# EAGLE board %C2%B5AvaNut_R2 (EAGLE 6.2)
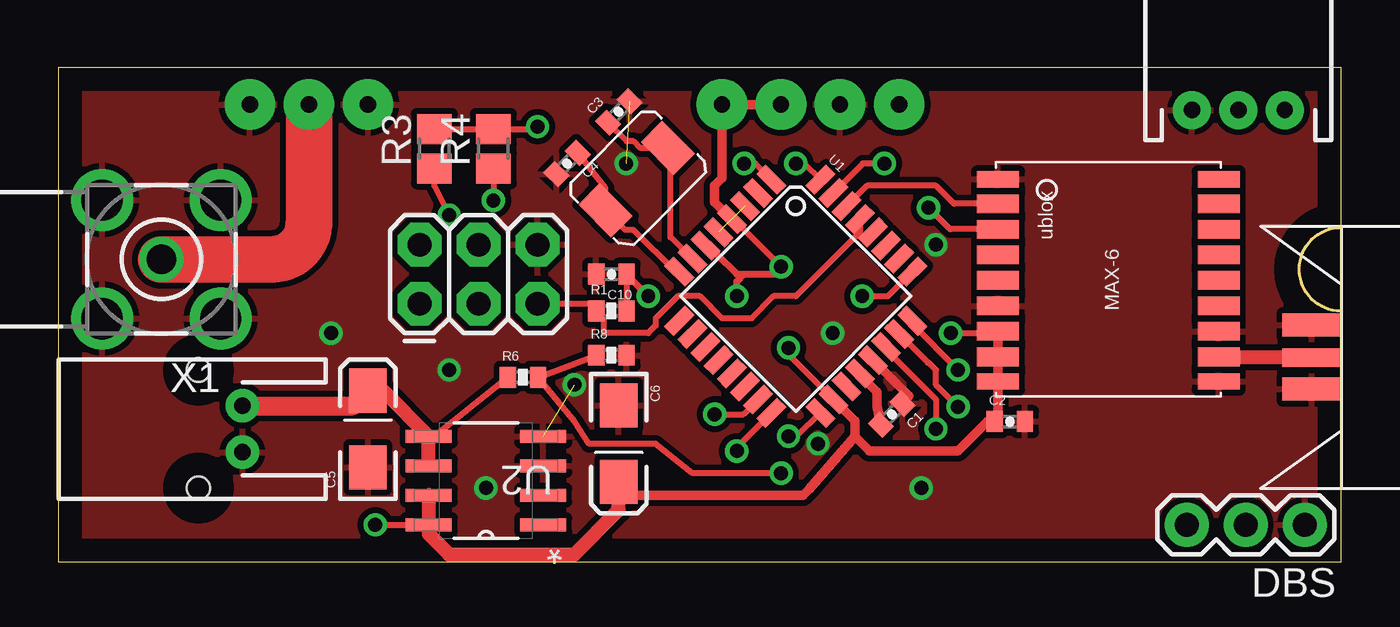
[diagram p0: board, top side]
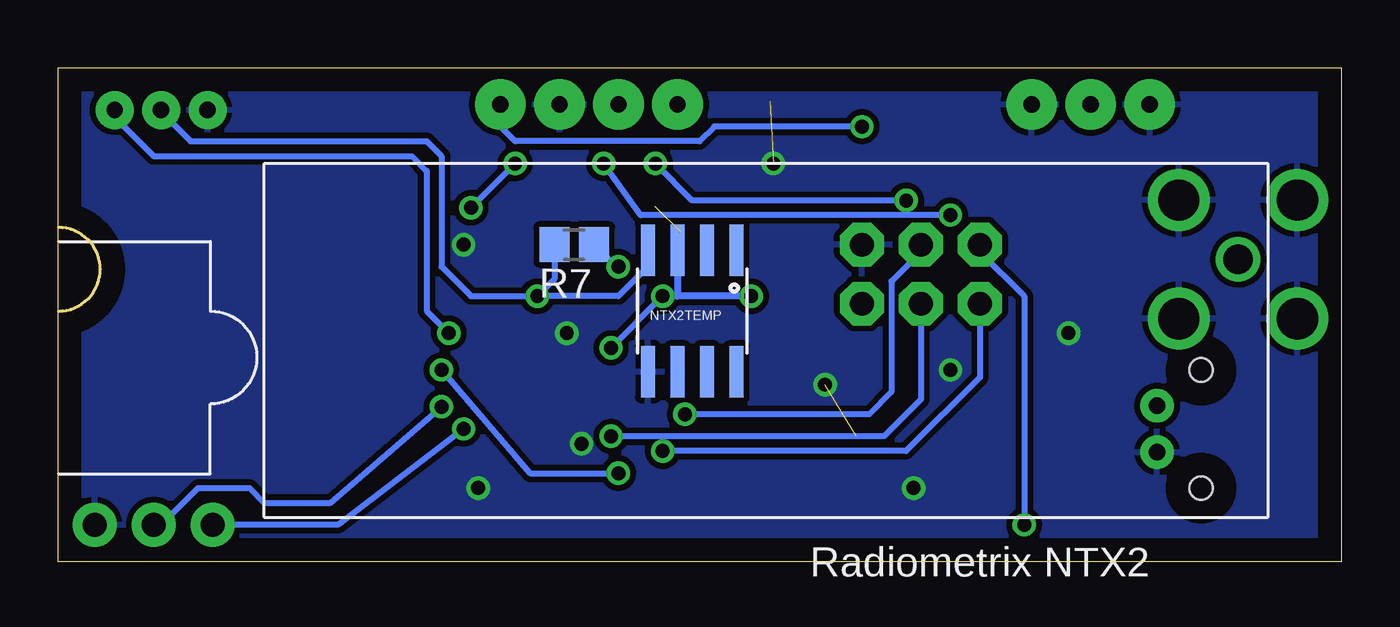
[diagram p1: board, bottom side, seen from below]

Size 55.23 x 21.26 mm. Coordinates in mm from the lower left corner, seen from the top.
Outline: 0,0 55.23,0 55.23,21.26 0,21.26 0,0
Copper layers (1*16): Top 0.035mm / dielectric 1.5mm / Bottom 0.035mm
Design rules: minimum track width 10mil, minimum drill 24mil, track to track 8mil, track to pad 8mil, pad to pad 8mil, via to via 8mil, smd to smd 8mil, copper to edge 40mil, drill to drill 8mil, minimum pad ring 10mil, minimum via ring 8mil, stop-mask expansion 4mil, vias tented up to drill 0mil, thermal gap 10mil
Net classes: 1 vcc: width 0.254 mm

## Footprints (pad centres in the part's own frame; a part is rotated, then mirrored left to right if it is on the bottom)
0402-CAP = smd 0.7 x 0.9: 1 -0.65,0; 2 0.65,0
EIA3216-KIT = smd 1.9 x 1.6: A 1.65,0; C -1.65,0
1X03 = drill 1.016 pad 1.88: 1 0,0; 2 2.54,0; 3 5.08,0
2X3 = drill 1.016 pad 1.88 octagon: 1 0,0; 2 0,2.54; 3 2.54,0; 4 2.54,2.54; 5 5.08,0; 6 5.08,2.54
JST-3-PTH = drill 0.7 pad 1.626: 1 -2,-5; 2 0,-5; 3 2,-5
DS18B20_SOIC = smd 0.61 x 2.21: DQ 1.905,-2.616; GND 1.905,2.616; NC -1.905,-2.616; NC2 -0.635,-2.616; NC3 -1.905,2.616; NC4 -0.635,2.616; NC5 0.635,2.616; VCC 0.635,-2.616
0402-RES = smd 0.7 x 0.9: 1 -0.65,0; 2 0.65,0
R0805 = smd 1.3 x 1.5: 1 -0.85,0; 2 0.85,0
TQFP32-08 = smd 1.27 x 0.559: 1 -4.293,2.8; 2 -4.293,2; 3 -4.293,1.2; 4 -4.293,0.4; 5 -4.293,-0.4; 6 -4.293,-1.2; 7 -4.293,-2; 8 -4.293,-2.8; 17 4.293,-2.8; 18 4.293,-2; 19 4.293,-1.2; 20 4.293,-0.4; 21 4.293,0.4; 22 4.293,1.2; 23 4.293,2; 24 4.293,2.8 | smd 0.559 x 1.27: 9 -2.8,-4.293; 10 -2,-4.293; 11 -1.2,-4.293; 12 -0.4,-4.293; 13 0.4,-4.293; 14 1.2,-4.293; 15 2,-4.293; 16 2.8,-4.293; 25 2.8,4.293; 26 2,4.293; 27 1.2,4.293; 28 0.4,4.293; 29 -0.4,4.293; 30 -1.2,4.293; 31 -2,4.293; 32 -2.8,4.293
SOIC127P600X175-8N = smd 1.981 x 0.559: 1 -2.464,1.905; 2 -2.464,0.635; 3 -2.464,-0.635; 4 -2.464,-1.905; 5 2.464,-1.905; 6 2.464,-0.635; 7 2.464,0.635; 8 2.464,1.905
UBLOX_MAX-6 = smd 1.8 x 0.7: 1_GND 4.95,-4.4; 9_V_RESET 4.95,4.3; 10_GND -4.55,4.3; 18_RESERVED -4.55,-4.4 | smd 1.8 x 0.8: 2_TXD1 4.95,-3.35; 3_RXD1 4.95,-2.25; 4_TIMEPULSE 4.95,-1.15; 5_EXTINT0 4.95,-0.05; 6_V_BCKP 4.95,1.05; 7_VCC_IO 4.95,2.15; 8_VCC 4.95,3.25; 11_RF_IN -4.55,3.25; 12_GND -4.55,2.15; 13_ANTON -4.55,1.05; 14_VCC_RF -4.55,-0.05; 15_RESERVED -4.55,-1.15; 16_SDA2 -4.55,-2.25; 17_SCL2 -4.55,-3.35
ABRACON_ABM3_CRYSTAL = smd 1.3 x 2: P$1 -3.4,0.1; P$2 0.4,0.1
SARANTEL-SR1202 = smd 2.5 x 0.8: FEED 0,0 | smd 2.5 x 1: GND1 0,1.4; GND2 0,-1.35
NTX2 = drill 0.7 pad 2.184: 0V -2.54,-10.16; EN -7.62,-10.16; RFGND -22.86,-10.16; RFGND2 -27.94,-10.16; RFOUT -25.4,-10.16; TXD 0,-10.16; VCC -5.08,-10.16
M02-JST-PTH = drill 0.7 pad 1.448: 1 -1,0; 2 1,0 | hole 1: -2.54,1.905; 2.54,1.905
BU-SMA-H = drill 1.27: 1 0,0 | drill 1.778: 2 -2.55,2.55; 3 2.55,2.55; 4 2.55,-2.55; 5 -2.55,-2.55

## Placement (x,y rotation side)
C1  0.1uF  [0402-CAP]  35.88,6.35 225 top
C2  0.1uF  [0402-CAP]  40.96,6.03 0 top
C3  18pF  [0402-CAP]  24.13,19.37 45 top
C4  18pF  [0402-CAP]  21.91,17.14 225 top
C5  [EIA3216-KIT]  13.34,5.72 90 top
C6  4.7uF  [EIA3216-KIT]  24.13,5.08 270 top
C10  0.1uF  [0402-CAP]  23.81,12.38 180 top
DBS  [1X03]  53.66,1.59 180 top
FUCKINGANNOYING  AVR_SPI_PRG_6PTH  [2X3]  15.56,11.11 0 top
JP6  [JST-3-PTH]  50.8,24.45 0 top
NTX2TEMP  DS1821  [DS18B20_SOIC]  27.94,10.8 180 bottom
R1  10k  [0402-RES]  23.81,10.8 0 top
R3  47K  [R0805]  16.19,17.78 90 top
R4  39k  [R0805]  18.73,17.78 90 top
R6  100k  [0402-RES]  20,7.94 0 top
R7  4k7  [R0805]  33.02,13.65 180 bottom
R8  10k  [0402-RES]  23.81,8.89 0 top
U1  ATMEGA328  [TQFP32-08]  31.75,11.43 315 top
U2  TPS76633D  [SOIC127P600X175-8N]  18.41,3.49 180 top
U$1  UBLOX_MAX-6  [UBLOX_MAX-6]  45.4,12.06 180 top
U$2  ABRACON_ABM3_CRYSTAL  [ABRACON_ABM3_CRYSTAL]  26.04,17.46 45 top
U$3  SARANTEL-SR1202  [SARANTEL-SR1202]  53.95,8.79 0 top
U$4  NTX2  [NTX2]  36.2,9.53 180 bottom
U$6  M02-JST-PTH  [M02-JST-PTH]  7.94,5.72 90 top
X1  BU-SMA-H  [BU-SMA-H]  4.45,13.02 180 top

## Library data of the parts
C1-C6 C10 DBS FUCKINGANNOYING JP6 R1 R6 R8 U1 = SparkFun
NTX2TEMP U$1-U$4 U$6 = ava
R3 R4 R7 = resistor
U2 = ava; DESCRIPTION: ULTRALOW QUIESCENT CURRENT 250-mA LOW DROPOUT VOLTAGE REGULATORS; MPN: TPS76633D; OC_FARNELL: 8461422; OC_NEWARK: 77C1060; PACKAGE: SOIC-8; SUPPLIER: Texas Instruments
X1 = con-coax; OC_FARNELL: unknown; OC_NEWARK: unknown

## Nets
AREF: C1.2 U1.20
GND [vcc]: C1.1 C2.2 C3.2 C4.2 C5.C C6.C C10.2 DBS.1 FUCKINGANNOYING.6 JP6.1 NTX2TEMP.GND R8.2 U1.3 U1.5 U1.21 U2.3 U2.4 U$1.1_GND U$1.6_V_BCKP U$1.10_GND U$1.12_GND U$3.GND1 U$3.GND2 U$4.0V U$4.RFGND U$4.RFGND2 U$6.1 X1.2 X1.3 X1.4 X1.5
MISO: FUCKINGANNOYING.1 U1.16
MOSI: FUCKINGANNOYING.4 U1.15
N$1: U$4.RFOUT X1.1
N$2: R3.2 R4.2 U$4.TXD
N$4: U$1.11_RF_IN U$3.FEED
N$9: C3.1 U1.7 U$2.P$2
N$10: C4.1 U1.8 U$2.P$1
NSS_RX: DBS.2 U1.23
NSS_TX: DBS.3 U1.22
PB0: U1.12
PB1: U1.13
PD6: U1.10
PD7: U1.11
RADIO_MARK: R3.1 U1.32
RADIO_SPACE: R4.1 U1.1
RESET: FUCKINGANNOYING.5 R1.1 U1.29
SCK: FUCKINGANNOYING.3 U1.17
TEMPSENSORS: JP6.2 NTX2TEMP.DQ R7.2 U1.25
UBLOX_RXD: U1.31 U$1.3_RXD1
UBLOX_TXD: U1.30 U$1.2_TXD1
VBATT [vcc]: C5.A R6.1 U2.5 U2.6 U$6.2
VBATTADC: R6.2 R8.1 U1.24
VCC: C2.1 C6.A C10.1 FUCKINGANNOYING.2 JP6.3 NTX2TEMP.VCC R1.2 R7.1 U1.4 U1.6 U1.18 U2.7 U2.8 U$1.7_VCC_IO U$1.8_VCC U$1.9_V_RESET U$4.EN U$4.VCC

## Tracks (layer width: path | path; a pad name or v marks a point on that pad's centre or on a via)
AREF
  Top 0.406: U1.20 34.5,8.04 35.24,7.3 35.24,6.7 C1.2
GND  (via drill 0.6)  (3 unrouted)
  Top 0.406: C1.1 36.62,7.13 U1.21
  other vias: 33.34,9.84 37.15,3.18 32.7,5.08 24.45,17.14 37.78,13.65 22.23,7.62 16.83,8.26 11.75,9.84 18.41,3.18
  pour Top (isolate 0.254): 0,21.27 55.24,21.27 55.24,0 0,0
  pour Bottom (isolate 0.254): 0,21.27 55.24,21.27 55.24,0 0,0
MISO  (via drill 0.6)
  Top 0.254: v29.21,4.76 29.21,4.93 U1.16
  Bottom 0.254: FUCKINGANNOYING.1 15.56,7.94 18.73,4.76 v29.21,4.76
MOSI  (via drill 0.6)
  Top 0.254: v28.26,6.35 29.5,6.35 U1.15
  Bottom 0.254: FUCKINGANNOYING.4 18.1,13.34 19.37,12.06 19.37,7.3 20.32,6.35 v28.26,6.35
N$1
  Top 2: U$4.RFOUT 10.79,14.61 arc-90 9.21,13.02 X1.1
N$2  (via drill 0.6)
  Top 0.254: R3.2 R4.2 20.54,18.63 v20.64,18.73
  Bottom 0.254: v20.64,18.73 26.99,18.73 27.62,18.1 35.56,18.1 36.51,19.05 36.51,19.37 U$4.TXD
N$4
  Top 0.254: 53.73,8.81 U$3.FEED
  Top 0.61: U$1.11_RF_IN 53.73,8.81
N$9
  Top 0.254: U1.7 27.27,13.05 26.35,13.97 26.35,17.71 U$2.P$2 25.05,17.82 24.77,18.1 24.48,18.1 C3.1
N$10
  Top 0.254: U1.8 26.57,12.49 24.77,14.29 24.4,14.29 U$2.P$1 23.56,16.09 C4.1
NSS_RX  (via drill 0.6)
  Top 0.254: v38.73,6.67 37.78,7.62 37.78,8.26 37.47,8.57 37.44,8.57 U1.23
  Bottom 0.254: DBS.2 50.8,1.59 49.21,3.18 46.99,3.18 46.35,2.54 43.5,2.54 v38.73,6.67
NSS_TX  (via drill 0.6)
  Top 0.254: U1.22 35.63,9.13 37.78,6.98 v37.78,5.72
  Bottom 0.254: v37.78,5.72 43.18,1.59 DBS.3
RADIO_MARK  (via drill 0.6)
  Top 0.254: R3.1 16.19,16.19 v16.83,14.92 | v31.75,17.14 32.11,17.14 U1.32
  Bottom 0.254: v16.83,14.92 30.16,14.92 v31.75,17.14
RADIO_SPACE  (via drill 0.6)
  Top 0.254: R4.1 v18.73,15.56 | v29.53,17.14 30,17.14 U1.1
  Bottom 0.254: v18.73,15.56 27.94,15.56 v29.53,17.14
RESET
  Top 0.254: FUCKINGANNOYING.5 22.84,11.11 R1.1 23.5,10.46 23.5,9.84 25.4,9.84 25.72,10.16 25.72,10.48 26.67,11.43 27.62,11.43 28.57,10.48 29.84,10.48 30.8,11.43 31.75,11.43 34.5,14.18 U1.29
SCK  (via drill 0.6)
  Top 0.254: v31.43,5.4 31.79,5.4 U1.17
  Bottom 0.254: FUCKINGANNOYING.3 18.1,6.98 19.68,5.4 v31.43,5.4
TEMPSENSORS  (via drill 0.6)
  Top 0.254: v34.61,11.43 35.71,11.43 U1.25
  Bottom 0.254: R7.2 33.87,12.17 v34.61,11.43 | JP6.2 50.8,19.37 49.53,18.1 39.37,18.1 38.73,17.46 38.73,12.7 37.47,11.43 v34.61,11.43 | NTX2TEMP.DQ 29.84,12.7 31.11,11.43 v34.61,11.43
UBLOX_RXD  (via drill 0.6)
  Top 0.254: U$1.3_RXD1 38.39,14.31 v37.47,15.24 | v35.56,17.14 34.64,17.14 U1.31
  Bottom 0.254: v37.47,15.24 v35.56,17.14
UBLOX_TXD
  Top 0.254: U$1.2_TXD1 38.56,15.42 37.78,16.19 34.81,16.19 U1.30
VBATT
  Top 0.254: U2.5 16.18,5.4 R6.1
  Top 0.406: C5.A 13.98,7.37
  Top 0.61: 13.98,7.37 U2.5 U2.6
  Top 0.813: U$6.2 12.69,6.72 C5.A
VBATTADC  (via drill 0.6)
  Top 0.254: R8.1 R6.2 22.23,6.05 22.86,5.08 25.72,5.08 27.3,3.81 v31.11,3.81 | U1.24 36.77,10.22 v38.73,8.26
  Bottom 0.254: v38.73,8.26 34.92,3.81 v31.11,3.81
VCC  (via drill 0.6)
  Top 0.254: v13.65,1.59 U2.8 | v38.42,9.84 40.38,9.84 U$1.7_VCC_IO | C10.1 R1.2 | U1.4 29.07,14.75 v31.11,12.7 | v31.43,9.21 31.43,8.92 U1.18
  Top 0.3: U1.6 28.29,13.3 29.21,12.38 29.53,12.38 | 29.53,12.38 30.8,12.38 v31.11,12.7 | C10.1 24.46,12.37 v25.4,11.43 | v29.21,11.43 29.21,12.06 29.53,12.38
  Top 0.406: 34.29,5.4 32.32,3.11 32.07,2.86 24.45,2.86 24.13,2.54 | 34.29,5.4 34.29,6.06 U1.18 | U$1.7_VCC_IO U$1.8_VCC U$1.9_V_RESET 40.45,6.18 C2.1 40.01,6.03 38.73,4.76 34.92,4.76 34.29,5.4 | U1.4 28.26,15.49 28.26,16.19 28.57,16.51 U$4.EN U$4.VCC
  Top 0.61: U2.7 U2.8 15.95,1.19 16.83,0.32 22.23,0.32 24.13,2.22 24.13,2.54 C6.A
  Bottom 0.254: FUCKINGANNOYING.2 15.56,13.34 13.65,11.43 v13.65,1.59 | JP6.3 52.8,19.14 51.12,17.46 40.01,17.46 39.37,16.83 39.37,10.79 v38.42,9.84 | v31.11,12.7 31.22,12.7 R7.1 | v29.21,11.43 v31.43,9.21
  Bottom 0.3: v25.4,11.43 28.57,11.43 | 28.57,11.43 v29.21,11.43 | NTX2TEMP.VCC 28.57,11.43